# Altium PCB Receiver Board - Commercial China.PcbDoc
Units mil, origin at the board's own origin, x right, y up, seen from the top; angles counter-clockwise.
Board outline 2000 x 1000 mil, 2 copper layers (Top Layer, Bottom Layer); 23 components, 21 nets, 121 pads, 26 vias.
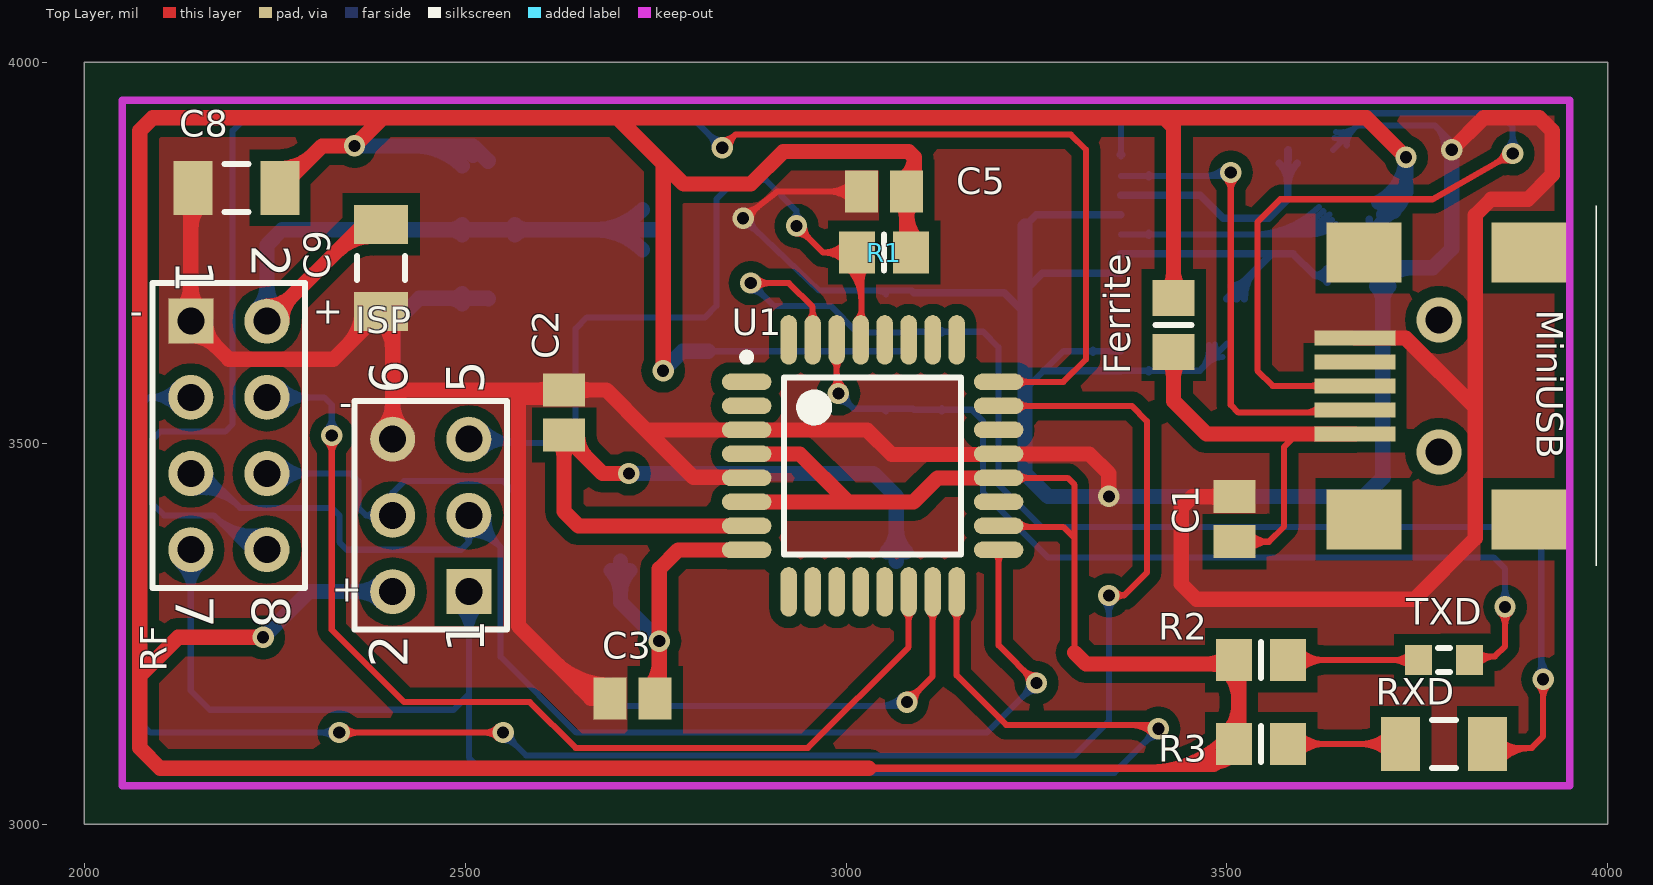
[diagram p0: Top Layer view]
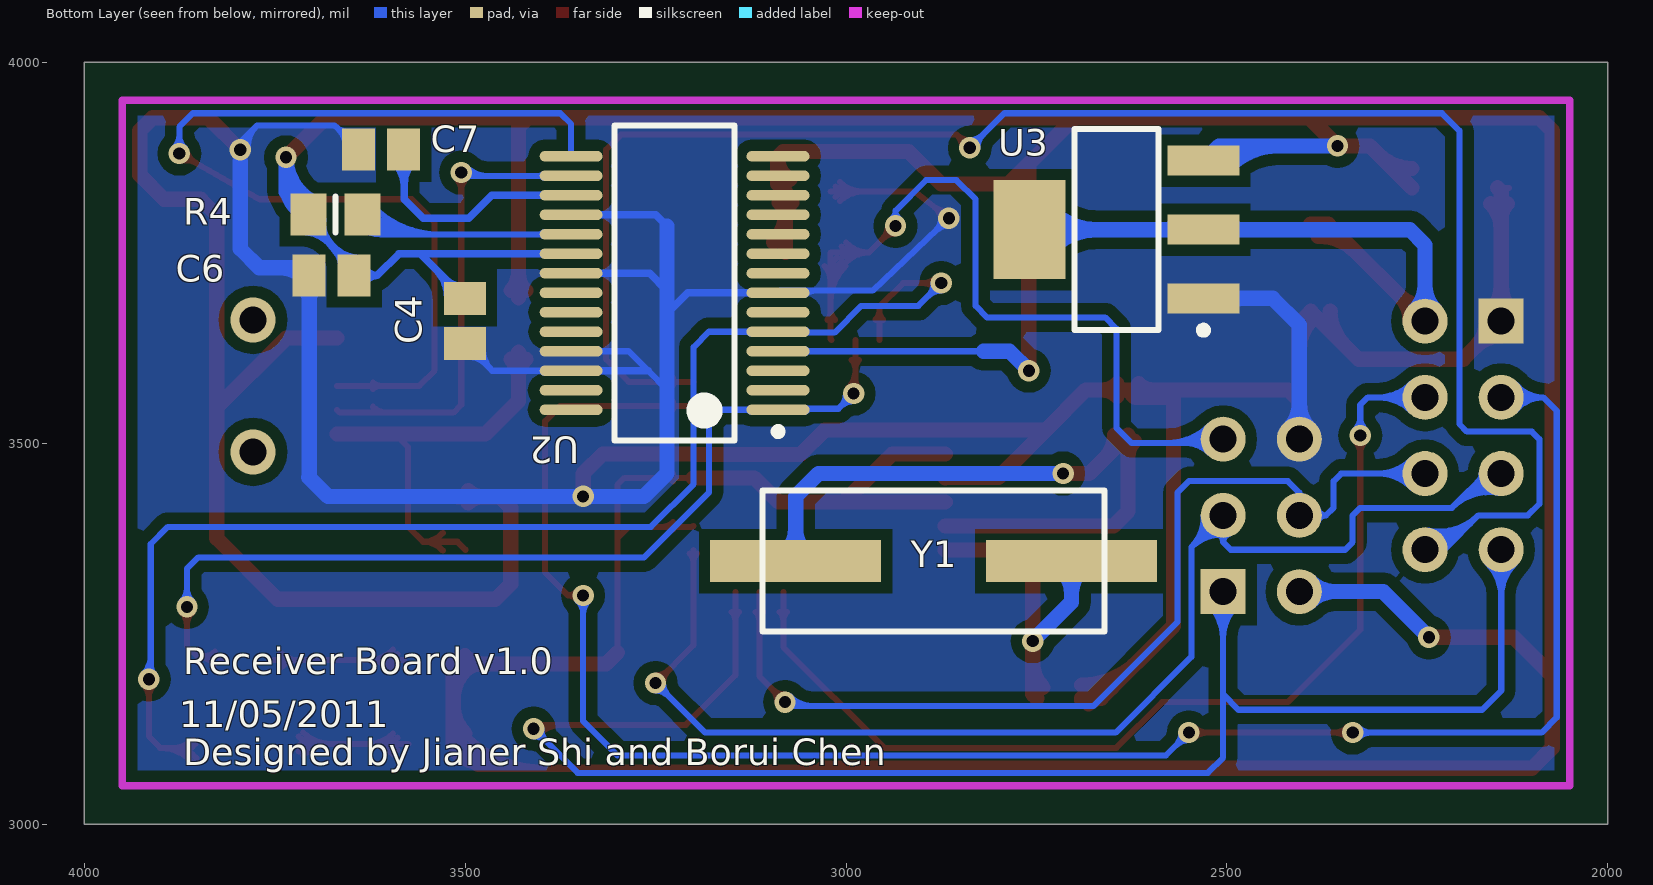
[diagram p1: Bottom Layer view, seen from below]

## Layer stack, top to bottom
Top Layer: signal copper 1.4
Dielectric: dielectric 12.6, FR-4, Dk 4.8
Bottom Layer: signal copper 1.4

## Board outline
2000,3000 4000,3000 4000,4000 2000,4000

## Design rules (kind name [scope] priority, off if disabled: settings)
Clearance "Polygon Clearance" [InPolygon] p1: gap=15
Clearance [All] p2: gap=8.1
HoleSize [All] p1: absolutevalues=TRUE maxlimit=100 minlimit=16 maxpercent=80.000 minpercent=20.000
MinimumAnnularRing [All] p1: minimumring=6
PolygonConnect [All] p1: connectstyle=Direct reliefconductorwidth=10 reliefentries=4 polygonreliefangle="90 Angle"
RoutingVias [All] p1: holewidth=16 width=28 viastyle="Through Hole" minholewidth=16 minwidth=27 maxholewidth=16 maxwidth=35
SilkscreenOverComponentPads [All] p1: minsilkscreentomaskgap=10
SolderMaskExpansion [All] p1: expansion=4
Width [All] p1: maxlimit=50 minlimit=8 preferedwidth=8
26 further rules are at their usual default settings.

## Classes and differential pairs
component class "5V to 3.3V": C8 C9 U3
component class "2.4ghz Receiver Board": C1 C2 C3 C4 C5 C6 C7 Ferrite ISP MiniUSB R1 R2 R3 R4 RF RXD TXD U1 U2 Y1

## Components (designator, comment, footprint, x,y, rotation, side; value= is the part's Value field where it differs from the comment)
C1 "Cap Semi" CAPC2012L 3510,3400 r90 top
C2 "Cap Semi" CAPC2012L 2630,3540 r270 top
C3 "Cap Semi" CAPC2012L 2720,3165 r0 top
C4 "Cap Semi" CAPC2012L 3500,3660 r90 bottom
C5 "Cap Semi" CAPC2012L 3050,3830 r0 top
C6 "Cap Semi" CAPC2012L 3675,3720 r180 bottom
C7 "Cap Semi" CAPC2012L 3610,3885 r0 bottom
C8 "Cap Pol3 TANT" capc3216n 2200,3835 r180 top
C9 "Cap Pol3 TANT" capc3216n 2390,3730 r270 top
Ferrite "Ferrite Bead 1A" RESC2012N 3430,3655 r90 top
ISP "Header 3X2" HDR2X3 2505,3305 r90 top
MiniUSB "Mini USB" "MINI USB" 3985,3575 r180 top
R1 "Res3" RESC2012N 3050,3750 r0 top
R2 "Res3" RESC2012N 3545,3215 r0 top
R3 "Res3" RESC2012N 3545,3105 r0 top
R4 "Res3" RESC2012N 3670,3800 r180 bottom
RF "Header 4X2" HDR2X4 2140,3660 r270 top (schematic designator "RF Board")
RXD "LED2" RESC3216N 3785,3105 r0 top
TXD "LED2" RESC1608N 3785,3215 r0 top
U1 "ATmega8L-8AI" 32A_N 3035,3470 r0 top
U2 "FT232RL-Reel" SSOP-28_N 3225,3710 r0 bottom
U3 "LM1117MPX-3.3" MP04A_N 2645,3780 r0 bottom
Y1 "XTAL 8Mhz" "HC-49U - SMD" 2885,3345 r180 bottom

## Footprints (in the part's own frame and the unit in brackets; to place one, negate y for a bottom-side part, rotate by r counter-clockwise, add the part's x,y. Pads: shape width x height; smd on the part's side, far side on the other; paste and mask are expansions set on the pad)
32A_N [mm] "Thin QFP, 32-Leads, Body 7x7mm, Pitch 0.8mm, IPC Medium Density"
  oval 1.65x0.55 smd: 1(-4.2,2.8) 2(-4.2,2) 3(-4.2,1.2) 4(-4.2,0.4) 5(-4.2,-0.4) 6(-4.2,-1.2) 7(-4.2,-2) 8(-4.2,-2.8) 17(4.2,-2.8) 18(4.2,-2) 19(4.2,-1.2) 20(4.2,-0.4) 21(4.2,0.4) 22(4.2,1.2) 23(4.2,2) 24(4.2,2.8)
  oval 0.55x1.65 smd: 9(-2.8,-4.2) 10(-2,-4.2) 11(-1.2,-4.2) 12(-0.4,-4.2) 13(0.4,-4.2) 14(1.2,-4.2) 15(2,-4.2) 16(2.8,-4.2) 25(2.8,4.2) 26(2,4.2) 27(1.2,4.2) 28(0.4,4.2) 29(-0.4,4.2) 30(-1.2,4.2) 31(-2,4.2) 32(-2.8,4.2)
  silkscreen extent -4.32,-2.95 2.95,3.75, body extent -3.5,-3.5 3.5,3.5, height 1.2
CAPC2012L [mm] "Chip Capacitor, Body 2.0x1.3mm, IPC High Density"
  rect 1.1x1.4 smd: 1(-0.75,0) 2(0.75,0)
  body extent -1.1,-0.72 1.1,0.72, height 1.1
capc3216n [mm] "Chip Capacitor, Body 3.2x1.6mm, IPC Medium Density"
  rect 1.3x1.8 smd: 1(-1.45,0) 2(1.45,0)
  silkscreen extent -0.4,-0.8 0.4,0.8, body extent -1.7,-0.9 1.7,0.9, height 1.35
"HC-49U - SMD" [mm] "Quartz Crystal, Thru-Hole; 2 Leads; Body 11.35 x 4.65 x 13.46 mm (LxWxH max)"
  rect 5.7x1.4 smd: 1(-4.6,0) 2(4.6,0)
  silkscreen extent -5.7,-2.35 5.7,2.35
HDR2X3 [mm] "Connector; Header; 3x2 Position"
  rect 1.5x1.5 hole 0.9: 1(0,0)
  round 1.5 hole 0.9: 2(0,2.54) 3(2.54,0) 4(2.54,2.54) 5(5.08,0) 6(5.08,2.54)
  silkscreen extent -1.27,-1.27 6.35,3.81
HDR2X4 [mm] "Connector; Header; 4x2 Position"
  rect 1.5x1.5 hole 0.9: 1(0,0)
  round 1.5 hole 0.9: 2(0,2.54) 3(2.54,0) 4(2.54,2.54) 5(5.08,0) 6(5.08,2.54) 7(7.62,0) 8(7.62,2.54)
  silkscreen extent -1.27,-1.27 8.89,3.81
"MINI USB" [mm] "Digikey http://search.digikey.com/us/en/products/1734035-2/A31727CT-ND/773789"
  rect 2.7x0.5 smd: 1(8.05,1.6) 2(8.05,0.8) 3(8.05,0) 4(8.05,-0.8) 5(8.05,-1.6)
  rect 2.5x2 smd: NC(2.25,4.45) NC(2.25,-4.45) NC(7.75,-4.45) NC(7.75,4.45)
  silkscreen extent 0,-6 0,6
MP04A_N [mm] "SOT223, 4-Leads, Body 6.5x3.5mm, Pitch 2.3mm, Lead Span 7mm, IPC Medium Density"
  rect 2.4x1 smd: 1(-2.9,2.3) 2(-2.9,0) 3(-2.9,-2.3)
  rect 2.4x3.3 smd: 4(2.9,0)
  silkscreen extent -3.02,-3.35 1.4,3.47, body extent -1.85,-3.35 1.85,3.35, height 1.8
RESC1608N [mm] "Chip Resistor, Body 1.6x0.8mm, IPC Medium Density"
  rect 0.9x1 smd: 1(-0.85,0) 2(0.85,0)
  silkscreen extent -0.2,-0.4 0.2,0.4, body extent -0.85,-0.48 0.85,0.48, height 0.6
RESC2012N [mm] "Chip Resistor, Body 2.0x1.3mm, IPC Medium Density"
  rect 1.2x1.4 smd: 1(-0.9,0) 2(0.9,0)
  silkscreen extent 0,-0.6 0,0.6, body extent -1.07,-0.7 1.07,0.7, height 0.65
RESC3216N [mm] "Chip Resistor, Body 3.2x1.6mm, IPC Medium Density"
  rect 1.3x1.8 smd: 1(-1.45,0) 2(1.45,0)
  silkscreen extent -0.4,-0.8 0.4,0.8, body extent -1.68,-0.87 1.68,0.87, height 0.71
SSOP-28_N [mm] "SOP, 28-Leads, Body 10.2x5.3mm, Pitch 0.65mm, IPC Medium Density"
  oval 2.1x0.35 smd: 1(-3.45,4.225) 2(-3.45,3.575) 3(-3.45,2.925) 4(-3.45,2.275) 5(-3.45,1.625) 6(-3.45,0.975) 7(-3.45,0.325) 8(-3.45,-0.325) 9(-3.45,-0.975) 10(-3.45,-1.625) 11(-3.45,-2.275) 12(-3.45,-2.925) 13(-3.45,-3.575) 14(-3.45,-4.225) 15(3.45,-4.225) 16(3.45,-3.575) 17(3.45,-2.925) 18(3.45,-2.275) 19(3.45,-1.625) 20(3.45,-0.975) 21(3.45,-0.325) 22(3.45,0.325) 23(3.45,0.975) 24(3.45,1.625) 25(3.45,2.275) 26(3.45,2.925) 27(3.45,3.575) 28(3.45,4.225)
  silkscreen extent -3.57,-5.25 2,5.25, body extent -2.8,-5.25 2.8,5.25, height 2

## Part data
C1 C2 C3 C4 C5 C6 C7: "Capacitor (Semiconductor SIM Model)"
C8 C9: library part "Cap Pol3", "Polarized Capacitor (Surface Mount)"
Ferrite: library part "Ferrite Bead"
ISP: "Header, 3-Pin, Dual row"
R1 R2 R3 R4: "Resistor"
RF: "Header, 4-Pin, Dual row"
RXD TXD: "Typical RED, GREEN, YELLOW, AMBER GaAs LED"
U1: "8-Bit AVR Microcontroller with 8K Bytes of In-System Programmable Flash Memory"
U2: "USB UART Asynchronous Serial Data Transfer Chip, SSOP-28, Tape and Reel"
U3: "800mA Low-Dropout Linear Regulator, 4-pin SOT-223"
Y1: library part XTAL, "Crystal Oscillator"

## Via types
v1: diameter 28, hole 16, Top Layer to Bottom Layer, 24 vias
v2: diameter 59.06, hole 35.43, Top Layer to Bottom Layer, 2 vias

## Nets (pads, with @x,y where several pads share a name; then routed paths per layer and width w, separated by ;. In a path a pad name is that pad's centre, name@x,y a point inside that pad or via, vN(x,y) a via of type N, cw(c..) or ccw(c..) an arc to the next point about the centre after c; other vN are vias at no path point)
3.3VCC: C9.1 RF.2 U3.2 U3.4 | length 1247.2
  Top Layer w20: RF.2 2367.09,3787.09 C9.1 ; RF.2@2240,3679.53 ccw(c2240,3726.67) 2273.34,3693.34 ccw(c2306.67,3660) RF.2@2259.53,3660 ; 2331.23,3751.23 cw(c2380.16,3702.3) C9.1@2380.16,3771.5
  Bottom Layer w20: RF.2@2226.19,3673.81 ccw(c2192.86,3707.14) 2240,3707.14 ccw(c2287.14,3707.14) RF.2@2253.81,3673.81 ; RF.2 2240,3760 2260,3780 U3.2 U3.4 ; U3.2@2496.42,3773.15 ccw(c2479.89,3756.62) 2479.89,3780 ccw(c2479.89,3803.38) U3.2@2496.42,3786.85 ; U3.2@2565.23,3773.15 cw(c2581.77,3756.62) 2581.77,3780 cw(c2581.77,3803.38) U3.2@2565.23,3786.85 ; U3.4@2732.84,3753.66 ccw(c2669.26,3690.08) 2669.26,3780 ccw(c2669.26,3869.92) U3.4@2732.84,3806.34
5VCC: C4.2 C5.2 C6.2 C8.1 Ferrite.2 ISP.2 R1.2 R2.1 R3.1 R4.1 U1.4 U1.6 U1.18 U1.20 U2.4 U2.20 U3.3 | length 9447.2
  Top Layer w8: U1.18 3201.61,3390 3285,3390 3300,3375 ; U1.20 3290.75,3454.25 3300,3445 3300,3375 ; U1.18@3226.84,3386.43 cw(c3235.45,3377.82) 3235.45,3390 ; U1.18@3226.84,3396.09 ccw(c3241.53,3410.78) 3241.53,3390 ; U1.20@3226.84,3449.42 cw(c3238.49,3437.77) 3238.49,3454.25 cw(c3238.49,3470.73) U1.20@3226.84,3459.08 ; 3300,3225 3300,3375 ; R2.1@3510.47,3210 R2.1@3515.47,3215
  Top Layer w10: 3030,3073.1 3483.57,3073.1 ; 3345,3926.9 3350,3931.9 ; 3397.1,3073.1 ccw(c3397.1,3213.53) R3.1@3496.4,3114.23 ; 3421.24,3073.1 ccw(c3421.24,3189.39) R3.1@3503.47,3107.16 ; 3445.38,3073.1 ccw(c3445.38,3165.25) R3.1@3510.54,3100.09 ; 3469.53,3073.1 ccw(c3469.53,3141.1) R3.1@3517.61,3093.02 ; R3.1@3491.25,3097.71 cw(c3463.95,3092.72) 3483.57,3073.1 ; R3.1@3508.39,3082.48 ccw(c3506.37,3050.31) 3483.57,3073.1 ; R3.1@3515.47,3105 3483.57,3073.1
  Top Layer w20: v1(2235,3245) 2123.1,3245 2073.1,3195 ; C8.1 2312.09,3890 v1(2355,3890) 2391.9,3926.9 ; C8.1@2257.09,3860.43 ccw(c2257.09,3921.83) 2300.5,3878.42 ; v1(2760,3595) 2760,3866.9 ; U1.6 3088.5,3422.76 3120,3454.25 U1.20 ; U1.4 2939.25,3485.75 3000,3425 ; 3030,3073.1 2100,3073.1 2073.1,3100 2073.1,3195 ; C5.2@3071.29,3815.85 cw(c3051.39,3795.96) 3079.53,3795.96 cw(c3107.66,3795.96) C5.2@3087.77,3815.85 ; C5.2@3073.53,3845.9 ccw(c3056.05,3875) 3090,3875 ; R1.2@3079.53,3750 C5.2 3090,3840.47 3090,3875 ; 3079.53,3801.08 ccw(c3132.58,3801.08) R1.2@3095.07,3763.57 ; 3300,3225 3315,3210 R2.1@3510.47,3210 ; Ferrite.2@3420.37,3700.07 ccw(c3397.11,3723.32) 3430,3723.32 ccw(c3462.89,3723.32) Ferrite.2@3439.63,3700.07 ; Ferrite.2 3430,3875 3430,3915 3418.1,3926.9 ; 3474.11,3210 ccw(c3474.11,3246.52) R2.1@3499.93,3220.7 ; 3479.25,3210 cw(c3479.25,3180.74) 3499.93,3201.43 cw(c3462.42,3163.92) 3515.47,3163.92 ; R3.1@3499.93,3118.57 ccw(c3462.42,3156.08) 3515.47,3156.08 ; R3.1@3515.47,3105 R2.1@3515.47,3215 ; v1(3735,3875) 3683.1,3926.9 3418.1,3926.9 ; 2073.1,3195 2073.1,3910 2090,3926.9 2391.9,3926.9 ; 2391.9,3926.9 2700,3926.9 ; 2700,3926.9 2760,3866.9 ; 2700,3926.9 3345,3926.9 3418.1,3926.9 ; 2760,3866.9 2786.9,3840 2875,3840 2917.7,3882.7 3082.3,3882.7 3090,3875
  Bottom Layer w8: 2819.57,3620.43 U2.4 ; U2.4@3052.68,3618.39 ccw(c3047.75,3613.46) 3047.75,3620.43 ccw(c3047.75,3627.41) U2.4@3052.68,3622.48
  Bottom Layer w10: U2.20 3558.86,3748.39 ; C4.2 3558.86,3748.39 ; C4.2@3505.91,3706.18 ccw(c3505.91,3732.13) 3524.25,3713.78 ; C4.2@3512.56,3689.53 cw(c3542.88,3689.53) C4.2@3521.44,3710.97 ; C4.2@3522.56,3689.53 cw(c3577.02,3689.53) 3538.51,3728.04 ; C6.2@3631.46,3711.01 ccw(c3615,3700.45) 3615,3720 ; C6.2@3631.46,3728.99 cw(c3615,3739.55) 3615,3720 ; C6.2@3643.11,3742.39 ccw(c3635.7,3794.16) 3677.55,3762.8 ; C6.2@3644.53,3732.49 ccw(c3640.54,3760.36) C6.2@3663.07,3743.48 ; C6.2@3645.47,3740.04 C6.2 ; C6.2@3661.96,3728.27 cw(c3689.79,3732.25) 3667.29,3749.11 ; 3673.16,3756.94 cw(c3715.59,3725.15) R4.1@3708.07,3777.63 ; 3680,3766.07 ccw(c3650.48,3788.19) R4.1@3687,3793.42 ; R4.1@3687.64,3776.26 cw(c3710.75,3758.94) R4.1@3706.66,3787.53 ; R4.1 C6.2 ; 3558.86,3748.39 3586.61,3748.39 3615,3720 ; 3615,3720 C6.2
  Bottom Layer w20: v1(2235,3245) 2295,3305 ISP.2 ; v1(2355,3890) 2510.28,3890 2530.28,3870 U3.3 ; ISP.2@2391.19,3291.19 ccw(c2357.86,3257.86) 2357.86,3305 ccw(c2357.86,3352.14) ISP.2@2391.19,3318.81 ; 2432.93,3890 cw(c2432.93,3800.22) U3.3@2496.42,3863.7 ; 2481.22,3890 cw(c2481.22,3848.5) U3.3@2510.56,3877.85 ; v1(2760,3595) 2785.43,3620.43 2819.57,3620.43 ; R4.1@3699.16,3816.03 ccw(c3668.57,3875) v1(3735,3875) 3735,3829.57 ; R4.1 3735,3829.57 ; R4.1@3705.58,3817.56 ccw(c3706.01,3858.56) 3735,3829.57 ; R4.1@3708.37,3798.28 ccw(c3685.64,3842.09) 3735,3842.09 ; R4.1@3719.06,3803.94 cw(c3742.44,3803.94) R4.1@3725.9,3820.47
\R\E\S\E\T\: ISP.5 R1.1 U1.29 | length 1514
  Top Layer w8: v1@2935,3775 cw(c2935,3750.86) 2952.07,3767.93 cw(c2969.14,3785) v1@2945,3785 ; v1(2935,3785) 2970,3750 ; R1.1@3000.09,3736.75 ccw(c2970,3709.2) 2970,3750 ; R1.1@3000.09,3763.25 cw(c2970,3790.8) 2970,3750 ; R1.1@3000.69,3732.19 cw(c2952.94,3684.43) 3020.47,3684.43 ; R1.1@3005.99,3742.15 ccw(c2988.17,3725.84) 2988.17,3750 ccw(c2988.17,3774.16) R1.1@3005.99,3757.85 ; R1.1@3006.35,3737.85 cw(c2972.25,3703.75) 3020.47,3703.75 ; R1.1@3012.01,3743.5 cw(c2991.57,3723.06) R1.1@3020.47,3723.06 ; U1.29@3014.42,3661.84 ccw(c2999.82,3676.44) 3020.47,3676.44 ; U1.29 3020.47,3636.57 3020.47,3750 2970,3750 ; 3020.47,3670.54 ccw(c3032.79,3670.54) U1.29@3024.08,3661.84 ; 3020.47,3712.95 cw(c3047.68,3712.95) R1.1@3028.44,3732.19
  Bottom Layer w8: ISP.5 2510,3500 2625,3500 2645,3520 2645,3650 2660,3665 2815,3665 2830,3680 2830,3820 2855,3845 2895,3845 2935,3805 ; ISP.5@2511.74,3511.74 ccw(c2540.07,3540.07) 2540.07,3500 ; ISP.5@2517.39,3492.61 cw(c2535.24,3474.76) 2535.24,3500 ; ISP.5@2517.39,3517.39 ccw(c2559.39,3559.39) 2559.39,3500 ; ISP.5@2523.05,3486.95 cw(c2554.56,3455.44) 2554.56,3500 ; ISP.5@2523.05,3523.05 ccw(c2578.7,3578.7) 2578.7,3500 ; v1@2929,3793 ccw(c2920,3805) 2935,3805 ; v1(2935,3785) 2935,3805 ; v1@2941,3793 cw(c2950,3805) 2935,3805
CE: RF.3 U1.23 | length 2808.3
  Top Layer w8: v1(2335,3120) v1(2550,3120) ; v1@2342.07,3112.93 cw(c2359.14,3095.86) 2359.14,3120 cw(c2359.14,3144.14) v1@2342.07,3127.07 ; v1@2542.93,3112.93 ccw(c2525.86,3095.86) 2525.86,3120 ccw(c2525.86,3144.14) v1@2542.93,3127.07 ; U1.23 3375,3548.74 3395,3528.74 3395,3330 3365,3300 ; U1.23@3226.84,3543.91 cw(c3238.49,3532.26) 3238.49,3548.74 cw(c3238.49,3565.22) U1.23@3226.84,3553.57 ; v1(3345,3300) 3365,3300 ; v1@3353,3294 cw(c3365,3285) 3365,3300 ; v1@3353,3306 ccw(c3365,3315) 3365,3300
  Bottom Layer w8: RF.3@2120.5,3543.52 ccw(c2085,3513.52) 2085,3560 ; RF.3@2120.5,3576.48 cw(c2085,3606.48) 2085,3560 ; RF.3@2126.61,3548.69 ccw(c2102.24,3528.09) 2102.24,3560 ccw(c2102.24,3591.91) RF.3@2126.61,3571.31 ; RF.3 2085,3560 ; v1@2327.93,3112.93 ccw(c2310.86,3095.86) 2310.86,3120 ccw(c2310.86,3144.14) v1@2327.93,3127.07 ; v1(2335,3120) 2087.1,3120 2067.1,3140 2067.1,3542.1 2085,3560 ; v1@2550,3110 cw(c2550,3085.86) 2567.07,3102.93 cw(c2584.14,3120) v1@2560,3120 ; v1(2550,3120) 2580,3090 3300,3090 3345,3135 v1(3345,3300) ; v1@3337.93,3292.93 cw(c3320.86,3275.86) 3345,3275.86 cw(c3369.14,3275.86) v1@3352.07,3292.93
CSN: RF.4 U1.14 | length 1597.8
  Top Layer w8: v1@2317.93,3502.93 cw(c2300.86,3485.86) 2325,3485.86 cw(c2349.14,3485.86) v1@2332.07,3502.93 ; v1(2325,3510) 2325,3255 2420,3160 2585,3160 2645,3100 2950,3100 3082.24,3232.24 U1.14 ; U1.14@3077.42,3278.16 cw(c3065.76,3266.51) 3082.24,3266.51 cw(c3098.73,3266.51) U1.14@3087.07,3278.16
  Bottom Layer w8: RF.4 2315,3560 2325,3550 v1(2325,3510) ; RF.4@2252.39,3547.61 cw(c2282.32,3517.68) 2282.32,3560 cw(c2282.32,3602.32) RF.4@2252.39,3572.39 ; RF.4@2258.05,3541.95 cw(c2301.63,3498.37) 2301.63,3560 cw(c2301.63,3621.63) RF.4@2258.05,3578.05 ; v1@2317.93,3517.07 ccw(c2300.86,3534.14) 2325,3534.14 ccw(c2349.14,3534.14) v1@2332.07,3517.07
GND: C1.2 C2.1 C3.1 C4.1 C5.1 C6.1 C7.2 C8.2 C9.2 ISP.6 MiniUSB.5 RF.1 U1.3 U1.5 U1.21 U2.7 U2.18 U2.21 U2.25 U2.26 U3.1 | length 8316.6
  Top Layer w8: C8.2@2130,3835 C8.2@2144.88,3835 ; v1(2865,3795) 2910,3830 C5.1 ; v1@2866.24,3804.92 ccw(c2869.23,3828.88) 2884.06,3809.82 ccw(c2898.88,3790.77) v1@2874.92,3793.76 ; C5.1@3007.99,3817.52 ccw(c2977.85,3787.38) 2977.85,3830 ccw(c2977.85,3872.62) C5.1@3007.99,3842.48 ; C5.1@3013.65,3823.17 ccw(c2997.17,3806.69) 2997.17,3830 ccw(c2997.17,3853.31) C5.1@3013.65,3836.83
  Top Layer w20: RF.1@2126.19,3673.81 ccw(c2092.86,3707.14) 2140,3707.14 ccw(c2187.14,3707.14) RF.1@2153.81,3673.81 ; C8.2@2131.89,3814.13 cw(c2112.31,3794.55) 2140,3794.55 ; RF.1@2140,3640.47 cw(c2140,3593.33) 2173.34,3626.66 cw(c2206.67,3660) RF.1@2159.53,3660 ; 2140,3780.49 cw(c2187.59,3780.49) C8.2@2153.94,3814.13 ; C8.2@2144.88,3835 2140,3830.12 RF.1 2190,3610 2327.09,3610 C9.2 2405,3657.91 2405,3555 ; 2346.58,3629.5 ccw(c2303.17,3672.91) C9.2@2364.57,3672.91 ; C9.2@2388.82,3661.89 cw(c2349.75,3622.82) 2405,3622.82 ; ISP.6@2391.19,3518.81 ccw(c2357.86,3552.14) 2405,3552.14 ccw(c2452.14,3552.14) ISP.6@2418.81,3518.81 ; ISP.6 2405,3555 ; C9.2@2405,3647.73 cw(c2425.03,3647.73) C9.2@2410.87,3661.89 ; 2572.96,3560 ccw(c2572.96,3620.66) 2615.85,3577.77 cw(c2595.96,3597.66) 2595.96,3569.53 cw(c2595.96,3541.39) C2.1@2615.85,3561.29 ; 2617.01,3212.99 ccw(c2690.47,3286.45) C3.1@2690.47,3182.56 ; C2.1@2644.15,3561.29 cw(c2664.04,3541.39) 2664.04,3569.53 cw(c2664.04,3597.66) C2.1@2644.15,3577.77 ; 2651.16,3178.84 ccw(c2690.47,3218.16) C3.1@2690.47,3162.56 ; C3.1@2681.65,3157.38 ccw(c2665,3142.99) 2665,3165 ; C3.1@2681.65,3172.62 cw(c2665,3187.01) 2665,3165 ; C3.1 2665,3165 ; U1.5 2868.9,3455 2800,3455 2737.76,3517.24 ; v1(3345,3430) 3345,3460 3319.25,3485.75 U1.21 3199.61,3485 3060,3485 3027.76,3517.24 U1.3 2737.76,3517.24 ; C1.2@3495.85,3421.29 ccw(c3475.96,3401.39) 3475.96,3429.53 ccw(c3475.96,3457.66) C1.2@3495.85,3437.77 ; C1.2 3454.53,3429.53 3440,3415 3440,3315 3460,3295 3745.93,3295 3825.93,3375 3825.93,3546.63 ; MiniUSB.5 3734.57,3637.99 3825.93,3546.63 ; v1(3795,3885) 3836.9,3926.9 3910,3926.9 3926.9,3910 3926.9,3851.9 3895,3820 3846.9,3820 3825.93,3799.03 3825.93,3546.63 ; 2405,3555 2419.53,3569.53 C2.1 ; C2.1 2685.47,3569.53 2737.76,3517.24 ; C2.1 2620.47,3560 2570,3560 2570,3260 2665,3165
  Bottom Layer w8: v1(2865,3795) 2965,3700 U2.7@3086.38,3700 ; v1@2865.26,3785 cw(c2865.88,3760.87) 2882.5,3778.37 cw(c2899.13,3795.88) v1@2875,3795.26 ; 3041,3700 cw(c3041,3683.48) U2.7@3052.68,3695.16 ; 3235,3570 3259.84,3594.84 3285.43,3620.43 U2.25 U2.25@3360.39,3620 ; U2.25@3324.33,3618.39 ccw(c3319.4,3613.46) 3319.4,3620.43 ccw(c3319.4,3627.41) U2.25@3324.33,3622.48 ; U2.26 3464.37,3594.84 ; U2.26@3397.32,3592.8 cw(c3402.25,3587.87) 3402.25,3594.84 cw(c3402.25,3601.82) U2.26@3397.32,3596.89 ; 3474.04,3604.51 cw(c3494.09,3584.46) C4.1@3494.09,3612.82 ; 3476.35,3606.82 ccw(c3456.37,3626.79) C4.1@3484.49,3629.54 ; C4.1@3476.52,3628.76 cw(c3434.55,3624.66) 3464.37,3594.84 ; C4.1 3464.37,3594.84 ; C7.2 3671.33,3916.8 ; C7.2@3641.42,3900.37 ccw(c3645.62,3921.37) C7.2@3660.75,3906.23 ; C7.2@3642.99,3908.22 ccw(c3649.14,3938.99) 3671.33,3916.8 ; C7.2@3657.18,3890.91 cw(c3685.54,3890.91) 3665.49,3910.96 ; v1@3785.02,3885.61 ccw(c3744.49,3888.09) 3773.2,3916.8 ; 3785.76,3904.24 cw(c3768.16,3886.64) v1@3793,3885.12 ; v1(3795,3885) 3795,3895 3773.2,3916.8 ; 3671.33,3916.8 3773.2,3916.8
  Bottom Layer w10: U2.7 3207.8,3697.2 3235,3670 ; 3235,3700 3257.8,3722.8 U2.21 ; 3235,3785 3249.57,3799.57 U2.18 ; 3259.84,3594.84 U2.26
  Bottom Layer w20: ISP.6@2391.19,3518.81 ccw(c2357.86,3552.14) 2405,3552.14 ccw(c2452.14,3552.14) ISP.6@2418.81,3518.81 ; ISP.6@2400,3510 ISP.6 2405,3655 2440,3690 2530.28,3690 U3.1 ; 2478.56,3690 cw(c2478.56,3664.74) U3.1@2496.42,3682.6 ; 2481.22,3690 ccw(c2481.22,3711.5) U3.1@2496.42,3696.3 ; 3235,3785 3235,3700 3235,3670 3235,3570 3235,3460 3265,3430 v1(3345,3430) 3680,3430 3705,3455 3704.53,3455.47 C6.1 3714.53,3730 3770,3730 3795,3755 3795,3870 ; C6.1@3696.29,3705.85 cw(c3676.39,3685.96) 3704.53,3685.96 cw(c3732.66,3685.96) C6.1@3712.77,3705.85 ; C6.1@3712.77,3717.67 cw(c3742.55,3687.89) 3742.55,3730
IRQ: RF.8 U1.24 | length 2649.5
  Top Layer w8: v1(2837.5,3887.5) 2854.8,3904.8 3295.2,3904.8 3315,3885 3315,3610 3285.24,3580.24 U1.24 ; v1@2837.5,3897.5 ccw(c2837.5,3921.64) 2854.57,3904.57 ccw(c2871.64,3887.5) v1@2847.5,3887.5 ; U1.24@3226.84,3575.41 cw(c3238.49,3563.76) 3238.49,3580.24 cw(c3238.49,3596.72) U1.24@3226.84,3585.06
  Bottom Layer w8: 2180.65,3394.35 ccw(c2224.79,3438.49) RF.8@2236.67,3377.21 ; 2191.3,3383.7 ccw(c2228.25,3420.66) RF.8@2238.19,3369.35 ; 2201.94,3373.06 ccw(c2231.7,3402.82) RF.8@2239.71,3361.5 ; RF.8@2235.14,3385.06 cw(c2221.33,3456.33) 2170,3405 ; RF.8 2215,3360 2170,3405 ; v1@2827.5,3887.5 ccw(c2803.36,3887.5) 2820.43,3904.57 ccw(c2837.5,3921.64) v1@2837.5,3897.5 ; v1(2837.5,3887.5) 2792.1,3932.9 2217.9,3932.9 2195,3910 2195,3525 2185,3515 2100,3515 2090,3505 2090,3420 2105,3405 2170,3405
MISO: ISP.1 RF.7 U1.16 | length 2567.1
  Top Layer w8: U1.16@3140.41,3278.16 cw(c3128.76,3266.51) 3145.24,3266.51 cw(c3161.72,3266.51) U1.16@3150.06,3278.16 ; U1.16 3145.24,3195 3210.24,3130 3405,3130 v1(3410,3125) ; 3373.79,3130 cw(c3373.79,3088.79) v1@3402.93,3117.93 ; 3393.1,3130 cw(c3393.1,3108.1) v1@3408.59,3123.59
  Bottom Layer w8: RF.7@2121.95,3341.95 cw(c2078.37,3298.37) 2140,3298.37 cw(c2201.63,3298.37) RF.7@2158.05,3341.95 ; RF.7@2127.61,3347.61 cw(c2097.68,3317.68) 2140,3317.68 cw(c2182.32,3317.68) RF.7@2152.39,3347.61 ; RF.7 2140,3175 2165,3150 2485,3150 2505,3170 ; ISP.1@2486.95,3286.95 cw(c2443.37,3243.37) 2505,3243.37 cw(c2566.63,3243.37) ISP.1@2523.05,3286.95 ; ISP.1@2492.61,3292.61 cw(c2462.68,3262.68) 2505,3262.68 cw(c2547.32,3262.68) ISP.1@2517.39,3292.61 ; ISP.1 2505,3170 ; v1@3400,3125 cw(c3375.86,3125) 3392.93,3107.93 cw(c3410,3090.86) v1@3410,3115 ; v1(3410,3125) 3352.1,3067.1 2525,3067.1 2505,3087.1 2505,3170
MOSI: ISP.4 RF.6 U1.15 | length 1620.6
  Top Layer w8: v1(3080,3160) 3113.74,3193.74 U1.15 ; v1@3080,3170 ccw(c3080,3194.14) 3097.07,3177.07 ccw(c3114.14,3160) v1@3090,3160 ; U1.15@3108.91,3278.16 cw(c3097.26,3266.51) 3113.74,3266.51 cw(c3130.22,3266.51) U1.15@3118.57,3278.16
  Bottom Layer w8: RF.6 2350,3460 2360,3450 2360,3415 2370,3405 ; RF.6@2252.39,3447.61 cw(c2282.32,3417.68) 2282.32,3460 cw(c2282.32,3502.32) RF.6@2252.39,3472.39 ; RF.6@2258.05,3441.95 cw(c2301.63,3398.37) 2301.63,3460 cw(c2301.63,3521.63) RF.6@2258.05,3478.05 ; ISP.4@2380.69,3397.2 ccw(c2370,3393.77) 2370,3405 ; ISP.4@2380.69,3412.8 cw(c2370,3416.23) 2370,3405 ; ISP.4@2400.92,3430.2 ccw(c2400.14,3435) 2405,3435 ; ISP.4@2409.08,3430.2 cw(c2409.86,3435) 2405,3435 ; 3043.79,3155 ccw(c3043.79,3196.21) v1@3072.93,3167.07 ; 3063.1,3155 ccw(c3063.1,3176.9) v1@3078.59,3161.41 ; v1(3080,3160) 3075,3155 2675,3155 2565,3265 2565,3435 2550,3450 2420,3450 2405,3435 ; 2370,3405 ISP.4 2405,3435
NetC1_1: C1.1 Ferrite.1 MiniUSB.1 | length 647.2
  Top Layer w8: C1.1@3499.53,3360 C1.1 3555,3370.47 ; C1.1@3529.15,3358.8 cw(c3555,3336.01) 3555,3370.47 ; C1.1@3529.15,3382.15 ccw(c3555,3404.93) 3555,3370.47 ; 3592.01,3512.01 3575,3495 3575,3390.47 3555,3370.47
  Top Layer w20: Ferrite.1@3420.37,3609.93 cw(c3397.11,3586.68) 3430,3586.68 cw(c3462.89,3586.68) Ferrite.1@3439.63,3609.93 ; Ferrite.1 3430,3555 3472.99,3512.01 3592.01,3512.01 MiniUSB.1
NetC2_2: C2.2 U1.7 Y1.1 | length 1098.6
  Top Layer w20: C2.2@2621.76,3502.23 cw(c2601.87,3482.34) 2630,3482.34 cw(c2658.13,3482.34) C2.2@2638.24,3502.23 ; C2.2@2647.56,3510.47 ccw(c2689.95,3510.47) 2659.98,3480.5 ; v1(2715,3460) 2680.47,3460 2655.47,3485 ; U1.7 2648.74,3391.26 2630,3410 2630,3435 C2.2 2655.47,3485 ; 2655.47,3485 cw(c2675.48,3505.01) 2647.45,3508.88 ccw(c2675.48,3505.01) 2655.47,3485
  Bottom Layer w20: v1(2715,3460) 3036.1,3460 3066.1,3430 Y1.1 ; Y1.1@3053.69,3357.42 ccw(c3023.71,3387.39) 3066.1,3387.39 ccw(c3108.49,3387.39) Y1.1@3078.52,3357.42
NetC3_2: C3.2 U1.8 Y1.2 | length 526.7
  Top Layer w20: C3.2@2741.29,3179.15 ccw(c2708.18,3212.25) 2755,3212.25 ; C3.2 2755,3170.47 v1(2755,3240) 2755,3335 2779.76,3359.76 U1.8
  Bottom Layer w20: Y1.2@2691.48,3332.58 cw(c2661.51,3302.61) 2703.9,3302.61 cw(c2746.29,3302.61) Y1.2@2716.31,3332.58 ; Y1.2 2703.9,3291.1 v1(2755,3240)
NetC7_1: C7.1 U2.17 | length 383.9
  Bottom Layer w10: U2.17 3464.84,3825.16 3495,3795 3555,3795 3580,3820 3580,3884.53 C7.1 C7.1@3580.47,3871.5 ; C7.1@3568.7,3867.32 cw(c3541.41,3840.03) 3580,3840.03 ; 3580,3837.75 cw(c3621.82,3837.75) C7.1@3592.25,3867.32
NetR2_2: R2.2 TXD.1 | length 341.6
  Top Layer w8: R2.2 TXD.1 ; R2.2@3588.65,3206.78 cw(c3608.49,3186.94) 3608.49,3215 cw(c3608.49,3243.06) R2.2@3588.65,3223.22 ; R2.2@3594.31,3201.13 cw(c3627.8,3167.63) 3627.8,3215 cw(c3627.8,3262.37) R2.2@3594.31,3228.87 ; TXD.1@3741.84,3205.3 ccw(c3718.42,3181.89) 3718.42,3215 ccw(c3718.42,3248.11) TXD.1@3741.84,3224.7
NetR3_2: R3.2 RXD.1 | length 393.5
  Top Layer w8: R3.2@3574.53,3105 RXD.1@3716.1,3105 ; R3.2@3588.65,3096.78 cw(c3608.49,3076.94) 3608.49,3105 cw(c3608.49,3133.06) R3.2@3588.65,3113.22 ; R3.2@3594.31,3091.13 cw(c3627.8,3057.63) 3627.8,3105 cw(c3627.8,3152.37) R3.2@3594.31,3118.87 ; RXD.1@3712.65,3089.73 ccw(c3675.79,3052.88) 3675.79,3105 ccw(c3675.79,3157.12) RXD.1@3712.65,3120.27 ; RXD.1@3718.3,3095.39 ccw(c3695.1,3072.19) 3695.1,3105 ccw(c3695.1,3137.81) RXD.1@3718.3,3114.61
NetR4_2: R4.2 U2.19 | length 667.5
  Bottom Layer w8: U2.19 3608.54,3773.98 ; U2.19@3397.32,3771.93 cw(c3402.25,3767) 3402.25,3773.98 cw(c3402.25,3780.95) U2.19@3397.32,3776.02 ; 3533.87,3773.98 ccw(c3533.87,3896.76) R4.2@3620.69,3809.94 ; 3553.19,3773.98 ccw(c3553.19,3877.44) R4.2@3626.35,3804.28 ; 3572.5,3773.98 ccw(c3572.5,3858.13) R4.2@3632.01,3798.62 ; 3591.81,3773.98 ccw(c3591.81,3838.82) R4.2@3637.66,3792.97 ; R4.2@3611.13,3773.98 ccw(c3611.13,3819.5) R4.2@3643.32,3787.31 ; R4.2@3615.12,3793.44 cw(c3592.17,3790.35) 3608.54,3773.98 ; R4.2@3627.3,3777.84 ccw(c3620.85,3761.67) 3608.54,3773.98 ; R4.2 3608.54,3773.98
NetRXD_2: RXD.2 U1.31 U2.5 | length 2052.1
  Top Layer w8: v1(2875,3710) 2925,3710 2956.26,3678.74 U1.31 ; v1@2882.07,3702.93 cw(c2899.14,3685.86) 2899.14,3710 cw(c2899.14,3734.14) v1@2882.07,3717.07 ; U1.31@2951.43,3661.84 ccw(c2939.78,3673.49) 2956.26,3673.49 ccw(c2972.74,3673.49) U1.31@2961.09,3661.84 ; RXD.2@3852.35,3086.25 cw(c3882.47,3060.14) 3882.47,3100 ; RXD.2@3853.9,3105 3858.9,3100 3900,3100 ; RXD.2@3857.35,3110.42 ccw(c3882.52,3135.59) 3882.52,3100 ; RXD.2@3858.4,3081.01 cw(c3900,3044.94) 3900,3100 ; v1@3907.93,3182.93 cw(c3890.86,3165.86) 3915,3165.86 cw(c3939.14,3165.86) v1@3922.07,3182.93 ; v1(3915,3190) 3915,3115 3900,3100
  Bottom Layer w8: v1@2875,3700 cw(c2875,3675.86) 2892.07,3692.93 cw(c2909.14,3710) v1@2885,3710 ; v1(2875,3710) 2905,3680 2980,3680 3015,3645 3088.15,3645 U2.5 3180,3646.02 3200,3626.02 3200,3446.1 3256.1,3390 3890,3390 3912.5,3367.5 3912.5,3192.5 v1(3915,3190) ; 3045.28,3645 ccw(c3045.28,3655.47) U2.5@3052.68,3648.07 ; U2.5@3125.67,3643.98 cw(c3130.6,3639.05) 3130.6,3646.02 cw(c3130.6,3653) U2.5@3125.67,3648.07 ; v1@3907.93,3197.07 ccw(c3896.89,3208.11) 3912.5,3208.11 ; 3912.5,3220.18 ccw(c3945.18,3220.18) v1@3922.07,3197.07
NetTXD_2: TXD.2 U1.30 U2.1 | length 1493.6
  Top Layer w8: v1@2982.93,3572.07 ccw(c2971.28,3583.72) 2987.76,3583.72 ; U1.30@2982.93,3608.87 cw(c2971.27,3597.22) 2987.76,3597.22 cw(c3004.24,3597.22) U1.30@2992.58,3608.87 ; 2987.76,3594.56 ccw(c3019.56,3594.56) v1@2997.07,3572.07 ; U1.30 2987.76,3567.24 v1(2990,3565) ; TXD.2 3823.46,3220 3851.73,3220 ; TXD.2@3828.16,3226.67 ccw(c3844.26,3242.76) 3844.26,3220 ; TXD.2@3829.48,3208.8 cw(c3851.73,3192.3) 3851.73,3220 ; v1@3857.93,3277.93 cw(c3840.86,3260.86) 3865,3260.86 cw(c3889.14,3260.86) v1@3872.07,3277.93 ; v1(3865,3285) 3865,3233.27 3851.73,3220
  Bottom Layer w8: v1@2990,3555 cw(c2990,3530.86) 3007.07,3547.93 cw(c3024.14,3565) v1@3000,3565 ; v1(2990,3565) 3010,3545 3087.83,3545 U2.1 3165,3543.66 3180,3528.66 3180,3435 3265,3350 3850,3350 3865,3335 v1(3865,3285) ; 3044.52,3545 cw(c3044.52,3533.45) U2.1@3052.68,3541.62 ; U2.1@3125.67,3541.62 cw(c3130.6,3536.68) 3130.6,3543.66 cw(c3130.6,3550.64) U2.1@3125.67,3545.7 ; v1@3857.93,3292.07 ccw(c3840.86,3309.14) 3865,3309.14 ccw(c3889.14,3309.14) v1@3872.07,3292.07
SCK: ISP.3 RF.5 U1.17 | length 2130.1
  Top Layer w8: U1.17@3195.53,3354.94 cw(c3183.87,3343.28) 3200.35,3343.28 cw(c3216.84,3343.28) U1.17@3205.18,3354.94 ; U1.17 3200.35,3234.65 v1(3250,3185) ; v1@3240,3185 ccw(c3215.86,3185) 3232.93,3202.07 ccw(c3250,3219.14) v1@3250,3195
  Bottom Layer w8: RF.5 2160,3460 2205,3415 ; RF.5@2140.24,3458.49 cw(c2145.97,3422.52) 2171.72,3448.28 ; RF.5@2141.5,3450.59 cw(c2149.01,3403.38) 2182.82,3437.18 ; RF.5@2142.76,3442.69 cw(c2152.06,3384.25) 2193.91,3426.09 ; RF.5@2144.01,3434.79 cw(c2155.11,3365.11) 2205,3415 ; RF.5@2165.53,3460 ccw(c2178.87,3460) 2169.44,3450.56 ; ISP.3@2497.2,3380.69 cw(c2493.77,3370) 2505,3370 ; ISP.3@2505.58,3387.48 cw(c2506.82,3349.66) 2533.58,3376.42 cw(c2560.34,3403.18) ISP.3@2522.52,3404.42 ; ISP.3@2505.84,3379.49 cw(c2507.66,3324.4) 2546.63,3363.37 ; ISP.3@2512.8,3380.69 ccw(c2516.23,3370) 2505,3370 ; ISP.3@2530.51,3404.16 ccw(c2585.6,3402.34) 2546.63,3363.37 ; v1@3240,3185 cw(c3215.86,3185) 3232.93,3167.93 cw(c3250,3150.86) v1@3250,3175 ; v1(3250,3185) 3185,3120 2646.1,3120 2546.63,3219.47 2546.63,3363.37 ; 2205,3415 2325,3415 2335,3405 2335,3370 2345,3360 2495,3360 2505,3370 ; 2505,3370 ISP.3 2546.63,3363.37
USBDM: MiniUSB.2 U2.16 | length 742.1
  Top Layer w8: v1@3497.93,3847.93 cw(c3480.86,3830.86) 3505,3830.86 cw(c3529.14,3830.86) v1@3512.07,3847.93 ; v1(3505,3855) 3505,3550 3515,3540 3664.57,3540 MiniUSB.2 ; 3602.2,3540 ccw(c3602.2,3566.07) MiniUSB.2@3620.63,3547.64
  Bottom Layer w8: U2.16 3500.75,3850.75 v1(3505,3855) ; U2.16@3397.32,3848.7 cw(c3402.25,3843.77) 3402.25,3850.75 cw(c3402.25,3857.72) U2.16@3397.32,3852.79 ; 3470.59,3850.75 ccw(c3470.59,3889.41) v1@3497.93,3862.07 ; 3489.91,3850.75 ccw(c3489.91,3870.09) v1@3503.59,3856.41 ; 3491.12,3850.75 cw(c3491.12,3841.12) v1@3497.93,3847.93
USBDP: MiniUSB.3 U2.15 | length 1408.5
  Top Layer w8: MiniUSB.3@3620.63,3570.87 ccw(c3610.66,3560.89) 3610.66,3575 ccw(c3610.66,3589.11) MiniUSB.3@3620.63,3579.13 ; MiniUSB.3 3560,3575 3540,3595 3540,3790 3570,3820 3770,3820 v1(3875,3880) ; v1@3865.35,3882.63 cw(c3842.06,3888.98) 3854.04,3868.02 cw(c3866.02,3847.06) v1@3872.37,3870.35
  Bottom Layer w8: U2.15@3358.78,3878.38 ccw(c3353.85,3883.32) 3360.83,3883.32 ccw(c3367.8,3883.32) U2.15@3362.87,3878.38 ; U2.15 3360.83,3918.73 3375,3932.9 3857.1,3932.9 3875,3915 v1(3875,3880) ; v1@3867.93,3887.07 ccw(c3850.86,3904.14) 3875,3904.14 ccw(c3899.14,3904.14) v1@3882.07,3887.07
pads on no net: MiniUSB.4 MiniUSB.NC U1.1 U1.2 U1.9 U1.10 U1.11 U1.12 U1.13 U1.19 U1.22 U1.25 U1.26 U1.27 U1.28 U1.32 U2.2 U2.3 U2.6 U2.8 U2.9 U2.10 U2.11 U2.12 U2.13 U2.14 U2.22 U2.23 U2.24 U2.27 U2.28
copper on no net:
  other v2: 3778.31,3488.39 3778.31,3661.61

## Polygon pours and split planes (outlines as drawn)
GND on Top Layer "Top Layer-No Net" (solid, pour order 2): 2025,3975 3975,3975 3975,3025 2025,3025
GND on Bottom Layer "bottom" (solid, pour order 4): 2025,3975 3975,3975 3975,3025 2025,3025

## Keep-outs
Keep-Out Layer:
  lines w10: 2050,3050 2050,3950 3950,3950 3950,3050 2050,3050

## Silkscreen, mask and mechanical layers (free items; w line width, h text height)
Top Overlay:
  text "-" at 2060,3645 h60
  text "+" at 2300,3645 h60
  text "-" at 2335,3525 h60
  text "+" at 2325,3280 h60
Bottom Overlay:
  text "Receiver Board v1.0" at 3870,3185 h60
  text "11/05/2011" at 3875,3115 h60
  text "Designed by Jianer Shi and Borui Chen" at 3870,3065 h60
Mechanical 4:
  lines w10: 2050,3050 2050,3950 3950,3950 3950,3050 2050,3050

## Dimensions
2050,3050 to 2050,3950 on Mechanical 1
2050,3050 to 3950,3050 on Mechanical 1

## Text inside footprints (layer, text, board x,y; h text height)
ISP: Top Overlay "6" at 2425,3565 h50 r90; Top Overlay "5" at 2525,3565 h50 r90; Top Overlay "2" at 2425,3205 h50 r90; Top Overlay "1" at 2525,3225 h50 r90
RF: Top Overlay "2" at 2220,3760 h50 r270; Top Overlay "1" at 2120,3740 h50 r270; Top Overlay "7" at 2120,3300 h50 r270; Top Overlay "8" at 2220,3300 h50 r270